# EAGLE board CT_schematic (EAGLE 7.6.0)

Size 100 x 80 mm. Coordinates in mm from the lower left corner, seen from the top.
Outline: 0,0 100,0 100,80 0,80 0,0
Copper layers (1*16): Top 0.035mm / dielectric 1.5mm / Bottom 0.035mm
Design rules "default": minimum track width 10mil, minimum drill 24mil, track to track 8mil, track to pad 8mil, pad to pad 8mil, via to via 8mil, smd to smd 8mil, copper to edge 40mil, drill to drill 8mil, minimum pad ring 10mil, minimum via ring 8mil, stop-mask expansion 4mil, vias tented up to drill 0mil, thermal gap 10mil

## Footprints (pad centres in the part's own frame; a part is rotated, then mirrored left to right if it is on the bottom)
C0603 = smd 0.8 x 0.8: 1 -0.762,0; 2 0.762,0
C0402 = smd 0.5 x 0.5: 1 -0.508,0; 2 0.508,0
C1210 = smd 1.2 x 2.5: 1 -1.524,0; 2 1.524,0
C0805 = smd 1.2 x 1.3: 1 -1.016,0; 2 1.016,0
R0603 = smd 0.8 x 0.8: 1 -0.762,0; 2 0.762,0
EXV-9H = smd 3.505 x 1.676: 1 -2.857,0; 2 2.857,0
L0603 = smd 0.8 x 0.8: 1 -0.762,0; 2 0.762,0
PJ-037B_PACKAGE = drill 3.7 square: 1 12,0 | drill 3.2 square: 2 6,0
UFBGA144 = smd 0.32 x 0.32: A1 -2.75,2.75; A2 -2.25,2.75; A3 -1.75,2.75; A4 -1.25,2.75; A5 -0.75,2.75; A6 -0.25,2.75; A7 0.25,2.75; A8 0.75,2.75; A9 1.25,2.75; A10 1.75,2.75; A11 2.25,2.75; A12 2.75,2.75; B1 -2.75,2.25; B2 -2.25,2.25; B3 -1.75,2.25; B4 -1.25,2.25; B5 -0.75,2.25; B6 -0.25,2.25; B7 0.25,2.25; B8 0.75,2.25; B9 1.25,2.25; B10 1.75,2.25; B11 2.25,2.25; B12 2.75,2.25; C1 -2.75,1.75; C2 -2.25,1.75; C3 -1.75,1.75; C4 -1.25,1.75; C5 -0.75,1.75; C6 -0.25,1.75; C7 0.25,1.75; C8 0.75,1.75; C9 1.25,1.75; C10 1.75,1.75; C11 2.25,1.75; C12 2.75,1.75; D1 -2.75,1.25; D2 -2.25,1.25; D3 -1.75,1.25; D4 -1.25,1.25; D5 -0.75,1.25; D6 -0.25,1.25; D7 0.25,1.25; D8 0.75,1.25; D9 1.25,1.25; D10 1.75,1.25; D11 2.25,1.25; D12 2.75,1.25; E1 -2.75,0.75; E2 -2.25,0.75; E3 -1.75,0.75; E4 -1.25,0.75; E5 -0.75,0.75; E6 -0.25,0.75; E7 0.25,0.75; E8 0.75,0.75; E9 1.25,0.75; E10 1.75,0.75; E11 2.25,0.75; E12 2.75,0.75; F1 -2.75,0.25; F2 -2.25,0.25; F3 -1.75,0.25; F4 -1.25,0.25; F5 -0.75,0.25; F6 -0.25,0.25; F7 0.25,0.25; F8 0.75,0.25; F9 1.25,0.25; F10 1.75,0.25; F11 2.25,0.25; F12 2.75,0.25; G1 -2.75,-0.25; G2 -2.25,-0.25; G3 -1.75,-0.25; G4 -1.25,-0.25; G5 -0.75,-0.25; G6 -0.25,-0.25; G7 0.25,-0.25; G8 0.75,-0.25; G9 1.25,-0.25; G10 1.75,-0.25; G11 2.25,-0.25; G12 2.75,-0.25; H1 -2.75,-0.75; H2 -2.25,-0.75; H3 -1.75,-0.75; H4 -1.25,-0.75; H5 -0.75,-0.75; H6 -0.25,-0.75; H7 0.25,-0.75; H8 0.75,-0.75; H9 1.25,-0.75; H10 1.75,-0.75; H11 2.25,-0.75; H12 2.75,-0.75; J1 -2.75,-1.25; J2 -2.25,-1.25; J3 -1.75,-1.25; J4 -1.25,-1.25; J5 -0.75,-1.25; J6 -0.25,-1.25; J7 0.25,-1.25; J8 0.75,-1.25; J9 1.25,-1.25; J10 1.75,-1.25; J11 2.25,-1.25; J12 2.75,-1.25; K1 -2.75,-1.75; K2 -2.25,-1.75; K3 -1.75,-1.75; K4 -1.25,-1.75; K5 -0.75,-1.75; K6 -0.25,-1.75; K7 0.25,-1.75; K8 0.75,-1.75; K9 1.25,-1.75; K10 1.75,-1.75; K11 2.25,-1.75; K12 2.75,-1.75; L1 -2.75,-2.25; L2 -2.25,-2.25; L3 -1.75,-2.25; L4 -1.25,-2.25; L5 -0.75,-2.25; L6 -0.25,-2.25; L7 0.25,-2.25; L8 0.75,-2.25; L9 1.25,-2.25; L10 1.75,-2.25; L11 2.25,-2.25; L12 2.75,-2.25; M1 -2.75,-2.75; M2 -2.25,-2.75; M3 -1.75,-2.75; M4 -1.25,-2.75; M5 -0.75,-2.75; M6 -0.25,-2.75; M7 0.25,-2.75; M8 0.75,-2.75; M9 1.25,-2.75; M10 1.75,-2.75; M11 2.25,-2.75; M12 2.75,-2.75
SAMTEC_FTSH-105-01-L-DV-K = smd 0.762 x 2.794: 1 -2.54,-2.032; 2 -2.54,2.032; 3 -1.27,-2.032; 4 -1.27,2.032; 5 0,-2.032; 6 0,2.032; 7 1.27,-2.032; 8 1.27,2.032; 9 2.54,-2.032; 10 2.54,2.032
TDFN-8/6MM = smd 0.3 x 0.75: 1 0,0; 2 0.5,0; 3 1,0; 4 1.5,0; 5 1.5,3; 6 1,3; 7 0.5,3; 8 0,3
S29VS256RABBHW000 = smd 0.3 x 0.3: A1 -6,3; A14 0.5,3; C3 -5,2; C4 -4.5,2; C5 -4,2; C6 -3.5,2; C7 -3,2; C8 -2.5,2; C9 -2,2; C10 -1.5,2; C11 -1,2; C12 -0.5,2; D3 -5,1.5; D4 -4.5,1.5; D5 -4,1.5; D6 -3.5,1.5; D7 -3,1.5; D8 -2.5,1.5; D9 -2,1.5; D10 -1.5,1.5; D11 -1,1.5; D12 -0.5,1.5; E3 -5,1; E4 -4.5,1; E5 -4,1; E6 -3.5,1; E7 -3,1; E8 -2.5,1; E9 -2,1; E10 -1.5,1; E11 -1,1; E12 -0.5,1; F3 -5,0.5; F4 -4.5,0.5; F5 -4,0.5; F6 -3.5,0.5; F7 -3,0.5; F8 -2.5,0.5; F9 -2,0.5; F10 -1.5,0.5; F11 -1,0.5; F12 -0.5,0.5; H1 -6,-0.5; H14 0.5,-0.5
SSOP-28 = smd 1.5 x 0.4: 1 -3.625,4.225; 2 -3.625,3.575; 3 -3.625,2.925; 4 -3.625,2.275; 5 -3.625,1.625; 6 -3.625,0.975; 7 -3.625,0.325; 8 -3.625,-0.325; 9 -3.625,-0.975; 10 -3.625,-1.625; 11 -3.625,-2.275; 12 -3.625,-2.925; 13 -3.625,-3.575; 14 -3.625,-4.225; 15 3.625,-4.225; 16 3.625,-3.575; 17 3.625,-2.925; 18 3.625,-2.275; 19 3.625,-1.625; 20 3.625,-0.975; 21 3.625,-0.325; 22 3.625,0.325; 23 3.625,0.975; 24 3.625,1.625; 25 3.625,2.275; 26 3.625,2.925; 27 3.625,3.575; 28 3.625,4.225
HTSS-105-01-G-D = drill 1 pad 1.8 square: 1 0,0 | drill 1 pad 1.8: 2 0,2.54; 3 2.54,0; 4 2.54,2.54; 5 5.08,0; 6 5.08,2.54; 7 7.62,0; 8 7.62,2.54; 9 10.16,0; 10 10.16,2.54
ABS07-32.768KHZ-7-T = smd 1.1 x 2.4: 1 -2.5,0; 2 0,0
ABLS-25.000MHZ-B2F-T = smd 5.6 x 2.8: 1 -3.81,0; 2 5.69,0
WSON-8 = smd 0.3 x 0.6: 1 -0.75,0; 2 0.05,0; 3 0.85,0; 4 1.65,0; 5 1.65,3.8; 6 0.85,3.8; 7 0.05,3.8; 8 -0.75,3.8 | smd 3 x 2.6: PAD 0.45,1.9
QFN-38_UHF = smd 0.75 x 0.3: 1 -2.4,2.75; 2 -2.4,2.25; 3 -2.4,1.75; 4 -2.4,1.25; 6 -2.4,0.25; 7 -2.4,-0.25; 8 -2.4,-0.75; 9 -2.4,-1.25; 10 -2.4,-1.75; 11 -2.4,-2.25; 12 -2.4,-2.75; 20 2.4,-2.75; 21 2.4,-2.25; 22 2.4,-1.75; 23 2.4,-1.25; 24 2.4,-0.75; 25 2.4,-0.25; 26 2.4,0.25; 27 2.4,0.75; 28 2.4,1.25; 29 2.4,1.75; 30 2.4,2.25; 31 2.4,2.75 | smd 0.758 x 0.3: 5 -2.4,0.75 | smd 0.3 x 0.75: 13 -1.5,-3.4; 14 -1,-3.4; 15 -0.5,-3.4; 16 0,-3.4; 17 0.5,-3.4; 18 1,-3.4; 19 1.5,-3.4; 32 1.5,3.4; 33 1,3.4; 34 0.5,3.4; 35 0,3.4; 36 -0.5,3.4; 37 -1,3.4; 38 -1.5,3.4 | smd 3.2 x 5.2: 39 0,0
IRF8306MTRPBF = smd 0.9 x 1.85: 1 0,0; 2 0,-2.35; 6 6.4,0; 7 6.4,-2.35 | smd 0.75 x 0.75: 3 1.75,-1.175 | smd 1.45 x 0.87: 4 3.5,-0.565; 5 3.5,-1.785
RUT0012A = smd 0.7 x 0.2: 1 -0.7,0.8; 2 -0.7,0.4; 3 -0.7,0; 4 -0.7,-0.4; 5 -0.7,-0.8; 7 0.7,-0.8; 8 0.7,-0.4; 9 0.7,0; 10 0.7,0.4; 11 0.7,0.8 | smd 0.2 x 0.7: 6 0,-0.85; 12 0,0.85
SW_4-1437565-2 = smd 1.4 x 2.1: 1 -2.23,4.55; 2 -2.23,-4.55; 3 2.23,4.55; 4 2.23,-4.55
LGM67K-G1J2-24-Z = smd 0.8 x 1.4: A -2,0; C 0,0
NC7SZ125M5X = smd 1.3 x 0.7: 1 -1.3,0.95; 2 -1.3,0; 3 -1.3,-0.95; 4 1.3,-0.95; 5 1.3,0.95

## Placement (x,y rotation side)
C1  1e-06  [C0603]  -54.61,73.66 0 top  (outside the outline)
C2  1e-07  [C0603]  -58.42,73.66 0 top  (outside the outline)
C3  1e-07  [C0603]  -62.23,73.66 0 top  (outside the outline)
C4  1e-07  [C0603]  -66.04,73.66 0 top  (outside the outline)
C5  1e-07  [C0603]  -69.85,73.66 0 top  (outside the outline)
C6  1e-07  [C0603]  -73.66,73.66 0 top  (outside the outline)
C7  1e-07  [C0603]  -77.47,73.66 0 top  (outside the outline)
C8  1e-07  [C0603]  -81.28,73.66 0 top  (outside the outline)
C9  1e-07  [C0603]  -85.09,73.66 0 top  (outside the outline)
C10  1e-07  [C0603]  -15.24,78.74 0 top  (outside the outline)
C11  1e-07  [C0603]  -19.05,78.74 0 top  (outside the outline)
C12  1e-07  [C0603]  -22.86,78.74 0 top  (outside the outline)
C13  1e-07  [C0603]  -26.67,78.74 0 top  (outside the outline)
C14  4.7e-06  [C0603]  -39.37,73.66 0 top  (outside the outline)
C15  1e-08  [C0603]  -30.48,78.74 0 top  (outside the outline)
C16  1e-06  [C0603]  -34.29,78.74 0 top  (outside the outline)
C17  1e-07  [C0603]  -38.1,78.74 0 top  (outside the outline)
C18  1e-07  [C0402]  -22.86,83.82 0 top  (outside the outline)
C19  1e-07  [C0402]  -26.67,83.82 0 top  (outside the outline)
C20  1e-11  [C0402]  -30.48,83.82 0 top  (outside the outline)
C21  1e-11  [C0402]  -34.29,83.82 0 top  (outside the outline)
C22  1e-11  [C0402]  -38.1,83.82 0 top  (outside the outline)
C23  1e-11  [C0402]  -41.91,83.82 0 top  (outside the outline)
C24  1e-07  [C0402]  -45.72,83.82 0 top  (outside the outline)
C25  1e-08  [C0402]  -49.53,83.82 0 top  (outside the outline)
C26  1e-07  [C0402]  -53.34,83.82 0 top  (outside the outline)
C27  2.2e-06  [C0603]  -43.18,73.66 0 top  (outside the outline)
C28  1e-07  [C0402]  -57.15,83.82 0 top  (outside the outline)
C29  2.2e-06  [C0603]  -46.99,73.66 0 top  (outside the outline)
C30  1e-07  [C0402]  -60.96,83.82 0 top  (outside the outline)
C31  1e-07  [C0402]  -64.77,83.82 0 top  (outside the outline)
C32  1e-07  [C0402]  -68.58,83.82 0 top  (outside the outline)
C33  1e-07  [C0402]  -72.39,83.82 0 top  (outside the outline)
C34  1e-07  [C0402]  -76.2,83.82 0 top  (outside the outline)
C35  1e-08  [C0402]  -80.01,83.82 0 top  (outside the outline)
C36  1e-05  [C1210]  -16.51,58.42 0 top  (outside the outline)
C37  1e-05  [C0805]  -59.69,57.15 0 top  (outside the outline)
C38  1e-08  [C0402]  -83.82,83.82 0 top  (outside the outline)
C39  1e-05  [C1210]  -22.86,58.42 0 top  (outside the outline)
C40  1e-05  [C0805]  -64.77,57.15 0 top  (outside the outline)
C41  8e-07  [R0603]  -41.91,78.74 0 top  (outside the outline)
C42  1e-05  [C1210]  -29.21,58.42 0 top  (outside the outline)
C43  1e-08  [C0402]  -15.24,88.9 0 top  (outside the outline)
C44  1e-05  [C1210]  -35.56,58.42 0 top  (outside the outline)
C45  1e-05  [C0805]  -69.85,57.15 0 top  (outside the outline)
C46  1e-07  [C0402]  -19.05,88.9 0 top  (outside the outline)
C47  2.2e-06  [C0603]  -50.8,73.66 0 top  (outside the outline)
C48  2.45e-08  [R0603]  -69.85,63.5 0 top  (outside the outline)
C49  2.8258362168397e-09  [R0603]  -80.01,57.15 0 top  (outside the outline)
C50  7.105e-09  [R0603]  -24.13,63.5 0 top  (outside the outline)
C51  0.0001  [EXV-9H]  -17.78,50.8 0 top  (outside the outline)
C52  0.0001  [EXV-9H]  -29.21,50.8 0 top  (outside the outline)
C53  1e-08  [C0402]  -22.86,88.9 0 top  (outside the outline)
C54  1e-07  [C0402]  -26.67,88.9 0 top  (outside the outline)
C55  1e-08  [C0402]  -30.48,88.9 0 top  (outside the outline)
C56  1e-07  [C0402]  -34.29,88.9 0 top  (outside the outline)
C57  1e-08  [C0402]  -38.1,88.9 0 top  (outside the outline)
C58  1e-08  [C0402]  -41.91,88.9 0 top  (outside the outline)
C59  1e-08  [C0402]  -45.72,88.9 0 top  (outside the outline)
F1  240.0  [L0603]  -45.72,78.74 0 top  (outside the outline)
J1  PJ-037B  [PJ-037B_PACKAGE]  -69.85,7.62 0 top  (outside the outline)
R2  1000.0  [R0603]  -49.53,78.74 0 top  (outside the outline)
R7  4700.0  [R0603]  -53.34,78.74 0 top  (outside the outline)
R8  4700.0  [R0603]  -57.15,78.74 0 top  (outside the outline)
R9  2200.0  [R0603]  -60.96,78.74 0 top  (outside the outline)
R11  2200.0  [R0603]  -64.77,78.74 0 top  (outside the outline)
R13  10000.0  [R0603]  -74.93,63.5 0 top  (outside the outline)
R14  10000.0  [R0603]  -80.01,63.5 0 top  (outside the outline)
R15  10000.0  [R0603]  -85.09,63.5 0 top  (outside the outline)
R16  10000.0  [R0603]  -15.24,68.58 0 top  (outside the outline)
R17  10000.0  [R0603]  -20.32,68.58 0 top  (outside the outline)
R18  10000.0  [R0603]  -25.4,68.58 0 top  (outside the outline)
R19  10000.0  [R0603]  -30.48,68.58 0 top  (outside the outline)
R20  5.0  [R0603]  -68.58,78.74 0 top  (outside the outline)
R21  10000.0  [R0603]  -35.56,68.58 0 top  (outside the outline)
R22  10000.0  [R0603]  -40.64,68.58 0 top  (outside the outline)
R23  10000.0  [R0603]  -45.72,68.58 0 top  (outside the outline)
R24  10000.0  [R0603]  -50.8,68.58 0 top  (outside the outline)
R25  10000.0  [R0603]  -55.88,68.58 0 top  (outside the outline)
R26  10000.0  [R0603]  -60.96,68.58 0 top  (outside the outline)
R27  10000.0  [R0603]  -66.04,68.58 0 top  (outside the outline)
R28  100000.0  [R0603]  -29.21,63.5 0 top  (outside the outline)
R29  100000.0  [R0603]  -34.29,63.5 0 top  (outside the outline)
R30  200.0  [R0603]  -72.39,78.74 0 top  (outside the outline)
R31  1000.0  [R0603]  -76.2,78.74 0 top  (outside the outline)
R32  100000.0  [R0603]  -39.37,63.5 0 top  (outside the outline)
R33  806.0  [R0603]  -80.01,78.74 0 top  (outside the outline)
R34  1000.0  [R0603]  -83.82,78.74 0 top  (outside the outline)
R35  100000.0  [R0603]  -44.45,63.5 0 top  (outside the outline)
R36  130000.0  [R0603]  -49.53,63.5 0 top  (outside the outline)
R37  100000.0  [R0603]  -54.61,63.5 0 top  (outside the outline)
R38  100000.0  [R0603]  -59.69,63.5 0 top  (outside the outline)
R39  200.0  [R0603]  -15.24,83.82 0 top  (outside the outline)
R40  1000.0  [R0603]  -19.05,83.82 0 top  (outside the outline)
R41  10000.0  [R0603]  -71.12,68.58 0 top  (outside the outline)
R42  75000.0  [R0603]  -76.2,68.58 0 top  (outside the outline)
R43  10000.0  [R0603]  -81.28,68.58 0 top  (outside the outline)
R44  10000.0  [R0603]  -86.36,68.58 0 top  (outside the outline)
R45  95300.0  [R0603]  -15.24,73.66 0 top  (outside the outline)
R46  95300.0  [R0603]  -20.32,73.66 0 top  (outside the outline)
R47  10000.0  [R0603]  -25.4,73.66 0 top  (outside the outline)
R48  10000.0  [R0603]  -30.48,73.66 0 top  (outside the outline)
R49  10000.0  [R0603]  -35.56,73.66 0 top  (outside the outline)
R50  100672.72727273  [R0603]  -19.05,63.5 0 top  (outside the outline)
R51  200000.0  [R0603]  -64.77,63.5 0 top  (outside the outline)
U1  STM32F412ZEJ6  [UFBGA144]  -43.18,21.59 0 top  (outside the outline)
U2  FTSH-105-01-L-DV-K  [SAMTEC_FTSH-105-01-L-DV-K]  -48.26,7.62 0 top  (outside the outline)
U3  24AA64T-I/MNY  [TDFN-8/6MM]  -77.47,19.05 0 top  (outside the outline)
U4  S29VS256RABBHW000  [S29VS256RABBHW000]  -63.5,40.64 0 top  (outside the outline)
U5  ST3241EBPR  [SSOP-28]  -19.05,7.62 0 top  (outside the outline)
U6  HTSS-105-01-G-D  [HTSS-105-01-G-D]  -62.23,19.05 0 top  (outside the outline)
U7  ABS07-32.768KHZ-7-T  [ABS07-32.768KHZ-7-T]  -71.12,49.53 0 top  (outside the outline)
U8  ABLS-25.000MHZ-B2F-T  [ABLS-25.000MHZ-B2F-T]  -48.26,50.8 0 top  (outside the outline)
U9  LP3878SDX-ADJ/NOPB  [WSON-8]  -60.96,30.48 0 top  (outside the outline)
U10  LP3878SDX-ADJ/NOPB  [WSON-8]  -81.28,30.48 0 top  (outside the outline)
U11  LP2951ACSDX/NOPB  [WSON-8]  -48.26,39.37 0 top  (outside the outline)
U12  LP3878SDX-ADJ/NOPB  [WSON-8]  -30.48,39.37 0 top  (outside the outline)
U13  LTC2928CUHF#PBF  [QFN-38_UHF]  -74.93,40.64 0 top  (outside the outline)
U14  IRF8306MTRPbF  [IRF8306MTRPBF]  -26.67,33.02 0 top  (outside the outline)
U15  IRF8306MTRPbF  [IRF8306MTRPBF]  -41.91,33.02 0 top  (outside the outline)
U16  LSF0204DRUTR  [RUT0012A]  -59.69,88.9 0 top  (outside the outline)
U17  4-1437565-2  [SW_4-1437565-2]  -27.94,21.59 0 top  (outside the outline)
U18  Q65110A2395  [LGM67K-G1J2-24-Z]  -80.01,49.53 0 top  (outside the outline)
U19  nc7sz125m5x  [NC7SZ125M5X]  -40.64,57.15 0 top  (outside the outline)
U20  nc7sz125m5x  [NC7SZ125M5X]  -46.99,57.15 0 top  (outside the outline)
U21  nc7sz125m5x  [NC7SZ125M5X]  -53.34,57.15 0 top  (outside the outline)

## Library data of the parts
C1-C59 F1 J1 R2 R7-R9 R11 R13-R51 U1-U21 = circuit_tree

## Nets
CLK_CRYSTAL_U1_B1: C20.1 U1.B1 U7.1
CLK_CRYSTAL_U1_C1: C21.1 U1.C1 U7.2
CLK_CRYSTAL_U1_D1: C22.1 U1.D1 U8.1
CLK_CRYSTAL_U1_E1: C23.1 U1.E1 U8.2
GND: C1.2 C2.2 C3.2 C4.2 C5.2 C6.2 C7.2 C8.2 C9.2 C10.2 C11.2 C12.2 C13.2 C14.2 C15.2 C16.2 C17.2 C18.2 C19.2 C20.2 C21.2 C22.2 C23.2 C24.2 C25.2 C26.2 C27.2 C28.2 C29.2 C30.2 C33.2 C34.2 C35.2 C36.2 C37.2 C38.2 C39.2 C40.2 C41.2 C42.2 C43.2 C44.2 C45.2 C46.2 C47.2 C48.2 C49.2 C50.2 C51.2 C52.2 C53.2 C54.2 C55.2 C56.2 C57.2 C58.2 C59.2 J1.2 R2.2 R13.2 R14.2 R19.2 R20.2 R23.2 R31.2 R34.2 R37.2 R40.2 R42.2 R45.2 R46.2 R47.2 R48.2 R49.2 U1.D2 U1.E6 U1.E7 U1.G4 U1.G8 U1.G10 U1.H6 U1.J1 U1.K1 U2.3 U2.5 U3.4 U4.C5 U4.D12 U4.E3 U4.F5 U5.23 U5.25 U6.9 U9.3 U9.PAD U10.3 U10.PAD U11.3 U11.4 U11.PAD U12.3 U12.PAD U13.8 U13.9 U13.10 U13.12 U13.13 U13.24 U13.25 U13.30 U13.32 U13.39 U16.6 U18.C U19.2 U19.3 U20.1 U20.3 U21.1 U21.3
NET_U1_B5: R11.1 U1.B5 U3.5
NET_U1_C5: R9.1 U1.C5 U3.6
NET_U1_D5: R13.1 U1.D5
NET_U1_E5: R14.1 U1.E5
NET_U1_F1: R8.1 U1.F1 U21.4
NET_U1_G9: C19.1 U1.G9
NET_U1_H5: R15.1 U1.H5
NET_U1_M1: C15.1 C16.1 F1.1 U1.L1 U1.M1
NET_U1_M11: U18.A
NET_U1_M12: U17.3 U17.4
NET_U2_9: R20.1 U2.9
NET_U3_1: R21.1 U3.1
NET_U3_2: R22.1 U3.2
NET_U3_3: R23.1 U3.3
NET_U4_C9: U4.C9
NET_U4_D8: R7.1 U4.D8 U20.4
NET_U5_1: C32.1 U5.1
NET_U5_2: C32.2 U5.2
NET_U5_3: C34.1 U5.3
NET_U5_22: R28.1 U5.22
NET_U5_24: C31.2 U5.24
NET_U5_27: C33.1 U5.27
NET_U5_28: C31.1 U5.28
NET_U6_3: U5.4 U6.3
NET_U6_4: U5.5 U6.4
NET_U6_5: U5.9 U6.5
NET_U6_6: U5.10 U6.6
NET_U9_1: C35.1 U9.1
NET_U9_6: R30.2 R31.1 U9.6
NET_U9_8: R29.1 U9.8
NET_U10_1: C38.1 U10.1
NET_U10_6: R33.2 R34.1 U10.6
NET_U10_8: R32.1 U10.8
NET_U11_5: R35.1 U11.5
NET_U11_7: R36.2 R37.1 U11.7
NET_U12_1: C43.1 U12.1
NET_U12_6: R39.2 R40.1 U12.6
NET_U12_8: R38.1 U12.8
NET_U13_3: R48.1 U13.3
NET_U13_6: R45.1 U13.6
NET_U13_7: R46.1 U13.7
NET_U13_16: R47.1 R50.1 U13.16
NET_U13_18: R44.1 U13.18
NET_U13_19: R43.1 U13.19 U13.20
NET_U13_21: R41.1 R42.1 U13.21 U19.4 U20.2 U21.2
NET_U13_22: C46.1 R41.2 R43.2 R44.2 U13.11 U13.22
NET_U13_26: C49.1 U13.26
NET_U13_27: C48.1 U13.27
NET_U13_28: C50.1 U13.28
NET_U13_38: R49.1 U13.38
NET_U14_3: U13.2 U14.3
NET_U15_3: U13.37 U15.3
NET_U16_12: R51.1 U16.12
NET_U17_1: R2.1 U17.1 U17.2
PROC_FSMC_A16: U1.H9 U4.D4
PROC_FSMC_A17: U1.L10 U4.C11
PROC_FSMC_A18: U1.K10 U4.D10
PROC_FSMC_A19: U1.A2 U4.C10
PROC_FSMC_A20: U1.B2 U4.D5
PROC_FSMC_A21: U1.B3 U4.C4
PROC_FSMC_A22: U1.B4 U4.C12
PROC_FSMC_A23: U1.A3 U4.D7
PROC_FSMC_CLK: U1.D9 U4.C6
PROC_FSMC_D0: U1.K11 U4.F3
PROC_FSMC_D1: U1.G12 U4.F4
PROC_FSMC_D2: U1.B10 U4.E6
PROC_FSMC_D3: U1.C10 U4.E7
PROC_FSMC_D4: U1.L2 U4.F8
PROC_FSMC_D5: U1.L7 U4.F9
PROC_FSMC_D6: U1.J3 U4.E10
PROC_FSMC_D7: U1.J7 U4.E11
PROC_FSMC_D8: U1.H8 U4.E4
PROC_FSMC_D9: U1.J8 U4.E5
PROC_FSMC_D10: U1.K8 U4.F6
PROC_FSMC_D11: U1.L8 U4.F7
PROC_FSMC_D12: U1.M8 U4.E8
PROC_FSMC_D13: U1.L9 U4.E9
PROC_FSMC_D14: U1.K9 U4.F11
PROC_FSMC_D15: U1.J9 U4.F12
PROC_FSMC_NE4: R25.1 U1.B8 U4.D11
PROC_FSMC_NL: U1.D6 U4.D6
PROC_FSMC_NOE: R27.1 U1.C9 U4.E12
PROC_FSMC_NWAIT: R24.1 U1.A8 U4.C3
PROC_FSMC_NWE: R26.1 U1.B9 U4.C8
PROC_SYS_JTCK_SWCLK: R19.1 U1.A11 U2.4
PROC_SYS_JTDI: R17.1 U1.A10 U2.8
PROC_SYS_JTDO_SWO: U1.A7 U2.6
PROC_SYS_JTMS_SWDIO: R18.1 U1.A12 U2.2
PROC_USART1_CTS_TOIOBUF: U16.5
PROC_USART1_CTS_TOXCVR: U5.13 U16.7
PROC_USART1_RTS_TOIOBUF: U16.3
PROC_USART1_RTS_TOXCVR: U5.18 U16.9
PROC_USART1_RX_TOIOBUF: U16.2
PROC_USART1_RX_TOXCVR: U5.19 U16.10
PROC_USART1_TX_TOIOBUF: U16.4
PROC_USART1_TX_TOXCVR: U5.14 U16.8
RST_OUT_U2_JTAG_RST_B: R16.1 U2.10 U19.1
VCC_12V4: C47.1 C51.1 C52.1 J1.1 R50.2 U13.23 U14.1 U14.2 U14.6 U14.7 U15.1 U15.2 U15.6 U15.7
VCC_S1_12V4: C36.1 C39.1 C41.1 R29.2 R32.2 U9.4 U10.4 U11.8 U14.4 U14.5
VCC_S2_12V4: C44.1 R38.2 U12.4 U15.4 U15.5
VCC_TIER1_1V2: C18.1 C37.1 R30.1 U1.H7 U9.5
VCC_TIER1_1V8: C1.1 C2.1 C3.1 C4.1 C5.1 C6.1 C7.1 C8.1 C9.1 C10.1 C11.1 C12.1 C13.1 C14.1 C17.1 C24.1 C25.1 C26.1 C27.1 C28.1 C29.1 C40.1 C55.1 C56.1 C57.1 C58.1 C59.1 F1.2 R7.2 R8.2 R9.2 R11.2 R15.2 R16.2 R17.2 R18.2 R21.2 R22.2 R24.2 R25.2 R26.2 R27.2 R33.1 R51.2 U1.C2 U1.C11 U1.D3 U1.F4 U1.F5 U1.F6 U1.F7 U1.F8 U1.F9 U1.F10 U1.G5 U1.G6 U1.G7 U2.1 U3.7 U3.8 U4.C7 U4.D3 U4.F10 U10.5 U16.1 U19.5 U20.5 U21.5
VCC_TIER1_3V0: C30.1 C42.1 C53.1 C54.1 R28.2 R35.2 R36.1 U5.26 U11.1 U16.11
VCC_TIER2_1V2: C45.1 R39.1 U12.5

## Tracks (layer width: path | path; a pad name or v marks a point on that pad's centre or on a via)
CLK_CRYSTAL_U1_B1  (2 unrouted)
CLK_CRYSTAL_U1_C1  (2 unrouted)
CLK_CRYSTAL_U1_D1  (2 unrouted)
CLK_CRYSTAL_U1_E1  (2 unrouted)
GND  (119 unrouted)
NET_U1_B5  (2 unrouted)
NET_U1_C5  (2 unrouted)
NET_U1_D5  (1 unrouted)
NET_U1_E5  (1 unrouted)
NET_U1_F1  (2 unrouted)
NET_U1_G9  (1 unrouted)
NET_U1_H5  (1 unrouted)
NET_U1_M1  (4 unrouted)
NET_U1_M12  (1 unrouted)
NET_U2_9  (1 unrouted)
NET_U3_1  (1 unrouted)
NET_U3_2  (1 unrouted)
NET_U3_3  (1 unrouted)
NET_U4_D8  (2 unrouted)
NET_U5_1  (1 unrouted)
NET_U5_2  (1 unrouted)
NET_U5_3  (1 unrouted)
NET_U5_22  (1 unrouted)
NET_U5_24  (1 unrouted)
NET_U5_27  (1 unrouted)
NET_U5_28  (1 unrouted)
NET_U6_3  (1 unrouted)
NET_U6_4  (1 unrouted)
NET_U6_5  (1 unrouted)
NET_U6_6  (1 unrouted)
NET_U9_1  (1 unrouted)
NET_U9_6  (2 unrouted)
NET_U9_8  (1 unrouted)
NET_U10_1  (1 unrouted)
NET_U10_6  (2 unrouted)
NET_U10_8  (1 unrouted)
NET_U11_5  (1 unrouted)
NET_U11_7  (2 unrouted)
NET_U12_1  (1 unrouted)
NET_U12_6  (2 unrouted)
NET_U12_8  (1 unrouted)
NET_U13_3  (1 unrouted)
NET_U13_6  (1 unrouted)
NET_U13_7  (1 unrouted)
NET_U13_16  (2 unrouted)
NET_U13_18  (1 unrouted)
NET_U13_19  (2 unrouted)
NET_U13_21  (5 unrouted)
NET_U13_22  (5 unrouted)
NET_U13_26  (1 unrouted)
NET_U13_27  (1 unrouted)
NET_U13_28  (1 unrouted)
NET_U13_38  (1 unrouted)
NET_U14_3  (1 unrouted)
NET_U15_3  (1 unrouted)
NET_U16_12  (1 unrouted)
NET_U17_1  (2 unrouted)
PROC_FSMC_A16  (1 unrouted)
PROC_FSMC_A17  (1 unrouted)
PROC_FSMC_A18  (1 unrouted)
PROC_FSMC_A19  (1 unrouted)
PROC_FSMC_A20  (1 unrouted)
PROC_FSMC_A21  (1 unrouted)
PROC_FSMC_A22  (1 unrouted)
PROC_FSMC_A23  (1 unrouted)
PROC_FSMC_CLK  (1 unrouted)
PROC_FSMC_D0  (1 unrouted)
PROC_FSMC_D1  (1 unrouted)
PROC_FSMC_D2  (1 unrouted)
PROC_FSMC_D3  (1 unrouted)
PROC_FSMC_D4  (1 unrouted)
PROC_FSMC_D5  (1 unrouted)
PROC_FSMC_D6  (1 unrouted)
PROC_FSMC_D7  (1 unrouted)
PROC_FSMC_D8  (1 unrouted)
PROC_FSMC_D9  (1 unrouted)
PROC_FSMC_D10  (1 unrouted)
PROC_FSMC_D11  (1 unrouted)
PROC_FSMC_D12  (1 unrouted)
PROC_FSMC_D13  (1 unrouted)
PROC_FSMC_D14  (1 unrouted)
PROC_FSMC_D15  (1 unrouted)
PROC_FSMC_NE4  (2 unrouted)
PROC_FSMC_NL  (1 unrouted)
PROC_FSMC_NOE  (2 unrouted)
PROC_FSMC_NWAIT  (2 unrouted)
PROC_FSMC_NWE  (2 unrouted)
PROC_SYS_JTCK_SWCLK  (2 unrouted)
PROC_SYS_JTDI  (2 unrouted)
PROC_SYS_JTDO_SWO  (1 unrouted)
PROC_SYS_JTMS_SWDIO  (2 unrouted)
PROC_USART1_CTS_TOXCVR  (1 unrouted)
PROC_USART1_RTS_TOXCVR  (1 unrouted)
PROC_USART1_RX_TOXCVR  (1 unrouted)
PROC_USART1_TX_TOXCVR  (1 unrouted)
RST_OUT_U2_JTAG_RST_B  (2 unrouted)
VCC_12V4  (13 unrouted)
VCC_S1_12V4  (9 unrouted)
VCC_S2_12V4  (4 unrouted)
VCC_TIER1_1V2  (4 unrouted)
VCC_TIER1_1V8  (67 unrouted)
VCC_TIER1_3V0  (9 unrouted)
VCC_TIER2_1V2  (2 unrouted)